# Altium PCB Nixie Valve Clock.PcbDoc (part 1 of 3)
Units mm, origin at the board's own origin, x right, y up, seen from the top; angles counter-clockwise.
Board outline 55 x 181 mm, 2 copper layers (Top Layer, Bottom Layer), stack 1.57 mm thick; 131 components, 140 nets, 506 pads, 541 vias.
Unrouted connection lines stored in the file: 104.
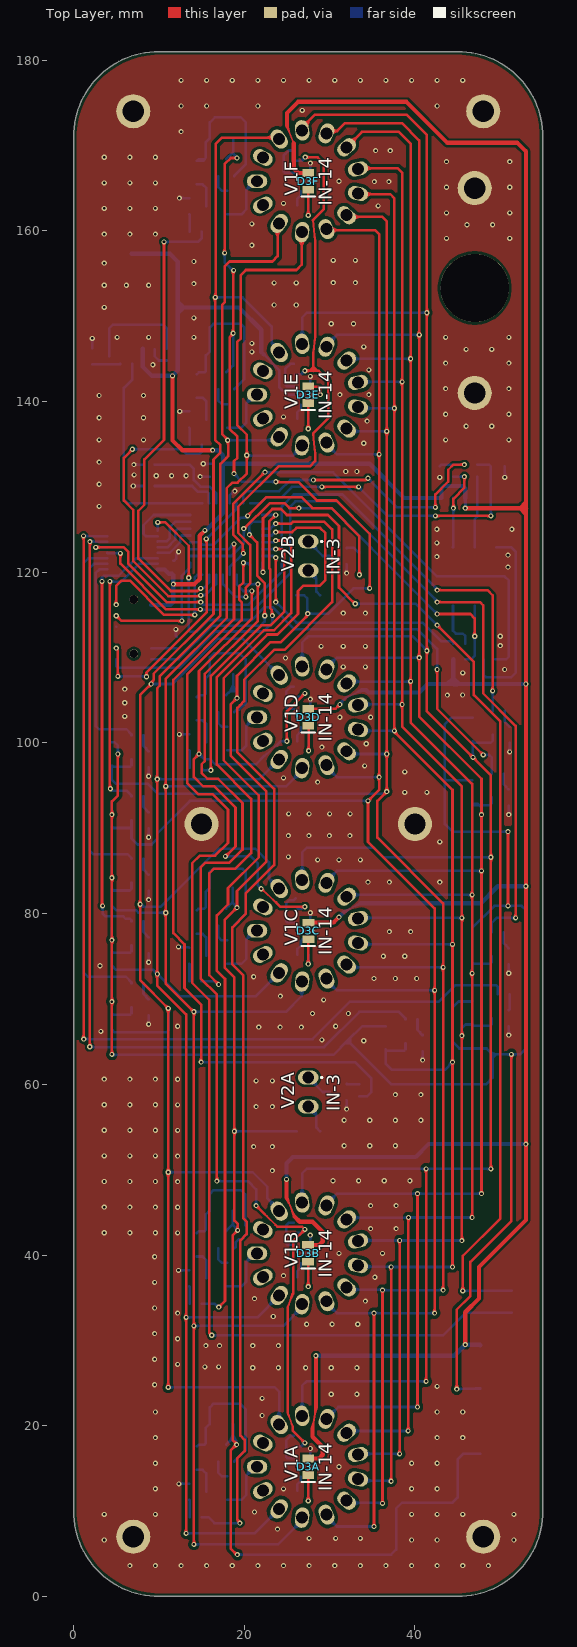
[diagram p0: Top Layer view]
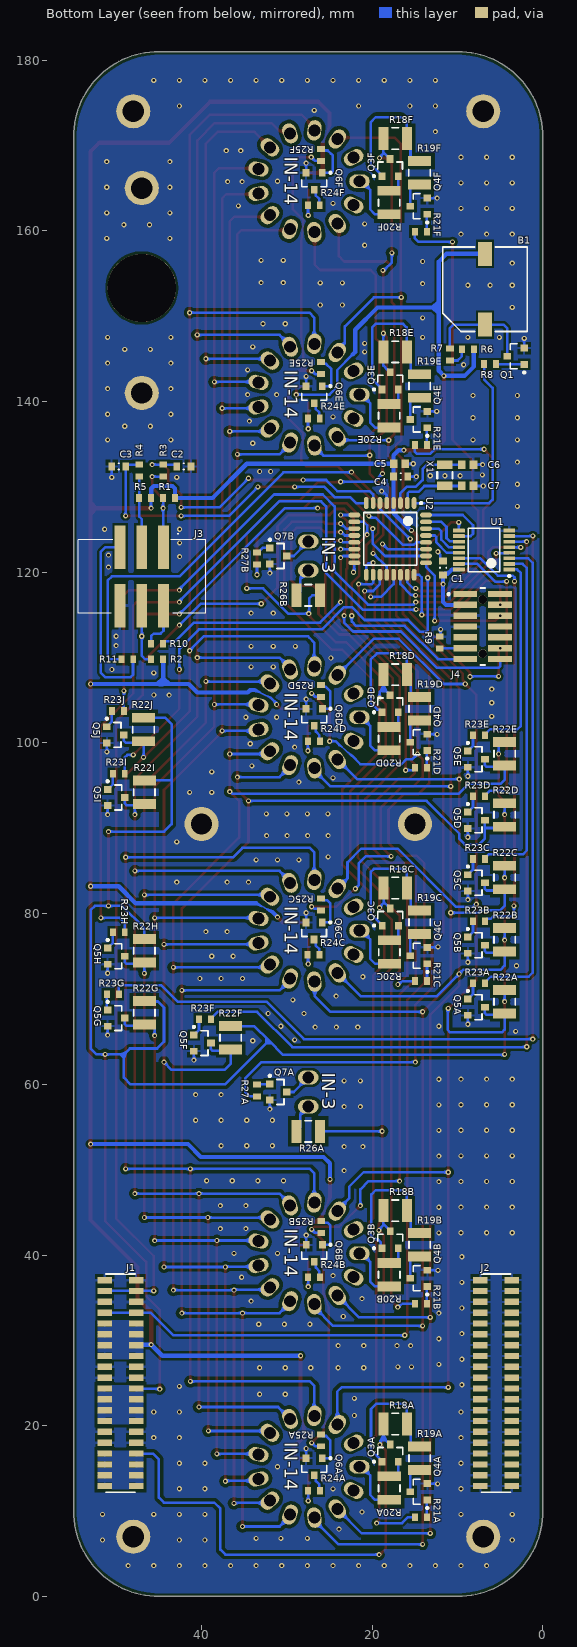
[diagram p1: Bottom Layer view, seen from below]
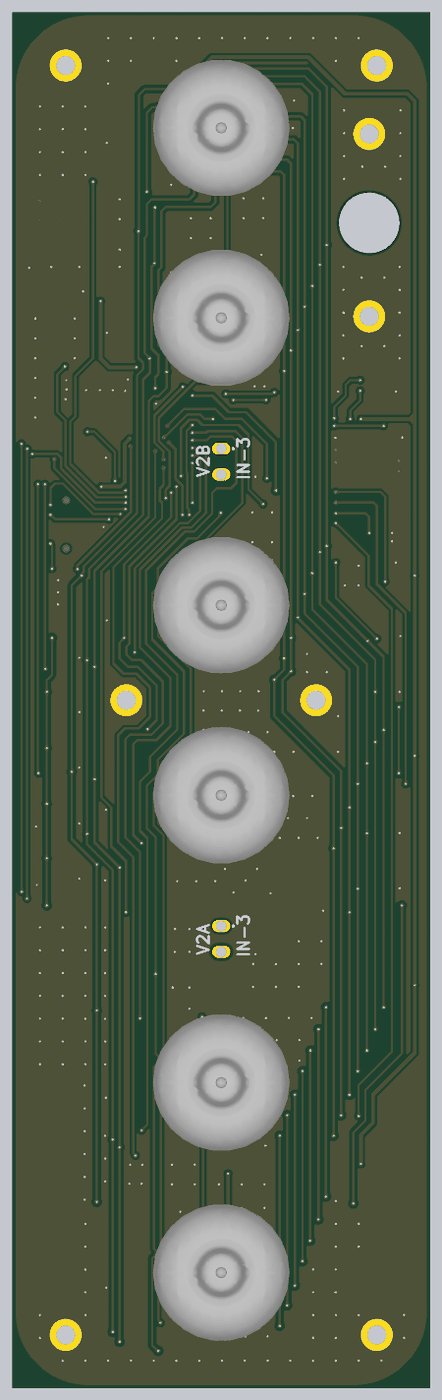
[diagram p3: 3D render of the assembled board from above, using the file's embedded part models]

## Layer stack, top to bottom
Top Solder: solder mask 0.01, SM-001, Dk 4
Top Layer: signal copper 0.035
Dielectric 1: core 1.5, FR4, Dk 4.3
Bottom Layer: signal copper 0.035
Bottom Solder: solder mask 0.01, SM-001, Dk 4

## Board outline
10,0 45,0 ccw(c45,10) 55,10 55,171 ccw(c45,171) 45,181 10,181 ccw(c10,171) 0,171 0,10 ccw(c10,10)

## Design rules (kind name [scope] priority, off if disabled: settings)
BoardOutlineClearance [All] p1: gap=0.4 ignorepadtopadclearanceinfootprint=FALSE
Clearance Clearance_HV [InNetClass('HIGH VOLTAGE')] p1: gap=0.4 ignorepadtopadclearanceinfootprint=FALSE
Clearance Clearance_HV_100V [InNetClass('HIGH VOLTAGE 100V')] p2: gap=0.4 ignorepadtopadclearanceinfootprint=FALSE
Clearance Clearance_NPTH_to_Track [IsThruPin AND NOT(PadIsPlated) vs IsTrack] p3: gap=0.2 ignorepadtopadclearanceinfootprint=FALSE
Clearance Clearance_GND_Planes [InPoly AND InNet('GND')] p4: gap=0.3 ignorepadtopadclearanceinfootprint=FALSE
Clearance Clearance_PTH_to_Track [IsTrack vs IsThruPin AND PadIsPlated] p5: gap=0.28 ignorepadtopadclearanceinfootprint=FALSE
Clearance Clearance_Via_to_Track [IsVia vs IsTrack] p6: gap=0.2 ignorepadtopadclearanceinfootprint=FALSE
Clearance Clearance_SMD_Pad_to_SMD_Pad [IsPad AND NOT(IsThruPin) vs IsPad AND NOT(IsThruPin)] p7: gap=0.15 ignorepadtopadclearanceinfootprint=FALSE
Clearance Clearance_Pad_to_Track [IsPad vs IsTrack] p8: gap=0.1 ignorepadtopadclearanceinfootprint=FALSE
Clearance Clearance_Inner_Cu_to_PTH [OnLayer('Inner 1') OR OnLayer('Inner 2') vs IsThruPin AND PadIsPlated] p9: gap=0.1 ignorepadtopadclearanceinfootprint=FALSE
Clearance Clearance_Inner_Cu_to_Vias [IsVia vs OnLayer('Inner 1') OR OnLayer('Inner 2')] p10: gap=1.95 ignorepadtopadclearanceinfootprint=FALSE
Clearance Clearance_Same_Nets [IsTrack vs IsTrack] p11: gap=0.25 ignorepadtopadclearanceinfootprint=FALSE
Clearance Minimum_Clearance [All] p12: gap=0.1 ignorepadtopadclearanceinfootprint=FALSE
HoleSize "Minimum Hole Size PTH" [(IsThruPin AND IsPad And PadIsPlated)] p1: absolutevalues=TRUE maxlimit=2.54 minlimit=0.3 maxpercent=80.000 minpercent=20.000
HoleSize "Minimum Hole Size VIA" [IsVia] p2: absolutevalues=TRUE maxlimit=2.54 minlimit=0.15 maxpercent=80.000 minpercent=20.000
HoleSize "Minimum Hole Size NPTH" [(IsThruPin AND IsPad And (NOT PadIsPlated))] p3: absolutevalues=TRUE maxlimit=2.54 minlimit=0.5 maxpercent=80.000 minpercent=20.000
HoleToHoleClearance ViaHoleToHoleClearance [IsVia vs IsVia] p1: gap=0.2 allowstackedmicrovias=TRUE
HoleToHoleClearance PadHoleToHoleClearance [IsPad vs IsPad] p2: gap=0.45 allowstackedmicrovias=TRUE
MinimumAnnularRing PTH_MinimumAnnularRing [(IsThruPin AND IsPad And PadIsPlated)] p1: minimumring=0.2
MinimumAnnularRing VIA_MinimumAnnularRing [IsVia] p2: minimumring=0.05
MinimumAnnularRing NPTH_MinimumAnnularRing [(IsThruPin AND IsPad And (NOT PadIsPlated))] p3: minimumring=0.45
MinimumSolderMaskSliver [All] p1: minsoldermaskwidth=0.1
PolygonConnect PolygonConnect_GND_Vias_and_Pads [(IsVia AND InNet('GND')) OR (IsPad AND IsThruPin AND NOT(InAnyComponent) AND InNet('GND')) vs IsPoly AND InNet('GND')] p1: connectstyle=Direct reliefconductorwidth=0.254 reliefentries=4 polygonreliefangle="90 Angle" airgapwidth=0.254
PolygonConnect PolygonConnect_GND_Polys [InNet('GND') AND IsPoly] p2: connectstyle=Relief reliefconductorwidth=0.3 reliefentries=4 polygonreliefangle="90 Angle" airgapwidth=0.3
PolygonConnect PolygonConnect_Non_GND_Polys [NOT(InNet('GND')) AND InPoly] p3: connectstyle=Direct reliefconductorwidth=0.254 reliefentries=4 polygonreliefangle="90 Angle" airgapwidth=0.254
RoutingVias [All] p1: holewidth=0.3 width=0.6 viastyle="Through Hole" minholewidth=0.3 minwidth=0.6 maxholewidth=5 maxwidth=3
SilkToSilkClearance [All] p1: silktosilkclearance=0.1
SilkToSolderMaskClearance [All] p1: minsilkscreentomaskgap=0 clearancetoexposedcopper=FALSE
SolderMaskExpansion SolderMaskExpansion_Tented_Vias [IsVia] p1: expansion=0 istentingtop=TRUE
SolderMaskExpansion [All] p2: expansion=0.1 istentingtop=FALSE
SupplyNets "Schematic Supply Nets_2" [InNet('+3V3')] p1: voltage=0.000
SupplyNets "Schematic Supply Nets_4" [InNet('GND')] p2: voltage=0.000
SupplyNets "Schematic Supply Nets_1" [InNet('+HV')] p3: voltage=0.000
SupplyNets "Schematic Supply Nets" [InNet('+100V')] p4: voltage=0.000
Width "Minimum Width" [All] p1: maxlimit=3 minlimit=0.2 preferedwidth=0.3
25 further rules are at their usual default settings.

## Classes and differential pairs
net class "HIGH VOLTAGE 100V": +100V C_0 C_1 C_2 C_3 C_4 C_5 C_6 C_7 C_8 C_9
net class C_[0..9]: C_0 C_1 C_2 C_3 C_4 C_5 C_6 C_7 C_8 C_9
net class POWER: +3V3 GND
net class "HIGH VOLTAGE": +HV ANODE_DRIVER_0 ANODE_DRIVER_1 ANODE_DRIVER_2 ANODE_DRIVER_3 ANODE_DRIVER_4 ANODE_DRIVER_5 NetQ3A_1 NetQ3A_2 NetQ3B_1 NetQ3B_2 NetQ3C_1 NetQ3C_2 NetQ3D_1 NetQ3D_2 NetQ3E_1 NetQ3E_2 NetQ3F_1 NetQ3F_2 NetR26A_1 NetR26B_1
component class "Nixie Valve Clock": C1 J1 J2 U1
net class T_L_SW_[0..2]: T_L_SW_0 T_L_SW_1 T_L_SW_2
net class IN-3_SW_[0..1]: IN-3_SW_0 IN-3_SW_1
net class BCD[0..3]: BCD0 BCD1 BCD2 BCD3
component class MCU: B1 C2 C3 C4 C5 C6 C7 J3 J4 Q1 R1 R2 R3 R4 R5 R6 R7 R8 R9 R10 R11 U2 X1
channel class "IN-3 VALVE CATHODE DRIVER": "IN-3 VALVE CATHODE DRIVER0" "IN-3 VALVE CATHODE DRIVER1"
net class IN-3_CATHODE_[0..1]: IN-3_CATHODE_0 IN-3_CATHODE_1
component class "IN-3 VALVE CATHODE DRIVER1": Q7B R27B
component class "IN-3 VALVE CATHODE DRIVER0": Q7A R27A
component class "IN-3 VALVE_1": R26B V2B
component class "IN-3 VALVE_0": R26A V2A
channel class "IN-3 VALVE": "IN-3 VALVE_0" "IN-3 VALVE_1"
channel class "IN-14 VALVE x2": IN-14_VALVE_x2_0 IN-14_VALVE_x2_1 IN-14_VALVE_x2_2
channel class "IN-14 VALVE CATHODE DRIVER": "IN-14 VALVE CATHODE DRIVER_0" "IN-14 VALVE CATHODE DRIVER_1" "IN-14 VALVE CATHODE DRIVER_2" "IN-14 VALVE CATHODE DRIVER_3" "IN-14 VALVE CATHODE DRIVER_4" "IN-14 VALVE CATHODE DRIVER_5" "IN-14 VALVE CATHODE DRIVER_6" "IN-14 VALVE CATHODE DRIVER_7" "IN-14 VALVE CATHODE DRIVER_8" "IN-14 VALVE CATHODE DRIVER_9"
channel class "IN-14 VALVE ANODE DRIVER": "IN-14 VALVE ANODE DRIVER0" "IN-14 VALVE ANODE DRIVER1" "IN-14 VALVE ANODE DRIVER2" "IN-14 VALVE ANODE DRIVER3" "IN-14 VALVE ANODE DRIVER4" "IN-14 VALVE ANODE DRIVER5"
channel class "IN-14 VALVE": "IN-14 VALVE_01" "IN-14 VALVE_02" "IN-14 VALVE_03" "IN-14 VALVE_11" "IN-14 VALVE_12" "IN-14 VALVE_13"
net class CS_[0..9]: CS_0 CS_1 CS_2 CS_3 CS_4 CS_5 CS_6 CS_7 CS_8 CS_9
net class AS_[0..5]: AS_0 AS_1 AS_2 AS_3 AS_4 AS_5
net class ANODE_DRIVER_[0..5]: ANODE_DRIVER_0 ANODE_DRIVER_1 ANODE_DRIVER_2 ANODE_DRIVER_3 ANODE_DRIVER_4 ANODE_DRIVER_5
component class "IN-14 VALVE CATHODE DRIVER_9": Q5J R22J R23J
component class "IN-14 VALVE CATHODE DRIVER_8": Q5I R22I R23I
component class "IN-14 VALVE CATHODE DRIVER_7": Q5H R22H R23H
component class "IN-14 VALVE CATHODE DRIVER_6": Q5G R22G R23G
component class "IN-14 VALVE CATHODE DRIVER_5": Q5F R22F R23F
component class "IN-14 VALVE CATHODE DRIVER_4": Q5E R22E R23E
component class "IN-14 VALVE CATHODE DRIVER_3": Q5D R22D R23D
component class "IN-14 VALVE CATHODE DRIVER_2": Q5C R22C R23C
component class "IN-14 VALVE CATHODE DRIVER_1": Q5B R22B R23B
component class "IN-14 VALVE CATHODE DRIVER_0": Q5A R22A R23A
component class "IN-14 VALVE ANODE DRIVER5": Q3F Q4F R18F R19F R20F R21F
component class "IN-14 VALVE ANODE DRIVER4": Q3E Q4E R18E R19E R20E R21E
component class "IN-14 VALVE ANODE DRIVER3": Q3D Q4D R18D R19D R20D R21D
component class "IN-14 VALVE ANODE DRIVER2": Q3C Q4C R18C R19C R20C R21C
component class "IN-14 VALVE ANODE DRIVER1": Q3B Q4B R18B R19B R20B R21B
component class "IN-14 VALVE ANODE DRIVER0": Q3A Q4A R18A R19A R20A R21A
component class "IN-14 VALVE_13": D3F Q6F R24F R25F V1F
component class "IN-14 VALVE_12": D3D Q6D R24D R25D V1D
component class "IN-14 VALVE_11": D3B Q6B R24B R25B V1B
component class "IN-14 VALVE_03": D3E Q6E R24E R25E V1E
component class "IN-14 VALVE_02": D3C Q6C R24C R25C V1C
component class "IN-14 VALVE_01": D3A Q6A R24A R25A V1A

## Components (designator, comment, footprint, x,y, rotation, side; value= is the part's Value field where it differs from the comment)
B1 "MI-SMT09-0327-SK" INDP9696X53N 6.8,153.15 r270 bottom
C1 "CGA3E2X7R1H104K080AA" CAPC1608X09N 11.7,120.5 r90 bottom value=100nF
C2 "CGA3E2X7R1H104K080AA" CAPC1608X09N 42.075,132.4 r180 bottom value=100nF
C3 "CGA3E2X7R1H104K080AA" CAPC1608X09N 49.7,132.4 r180 bottom value=100nF
C4 "CGA3E2X7R1H104K080AA" CAPC1608X09N 16.675,131.2 r180 bottom value=100nF
C5 "06036D476MAT2A" CAPC1608X87X35NL15T15 16.825,132.7 r180 bottom value=47µF
C6 "C0603X150J5GACTU" CAPC1608X87X35NL15T15 8.825,132.6 r180 bottom value=15pF
C7 "C0603X150J5GACTU" CAPC1608X87X35NL15T15 8.825,130.1 r180 bottom value=15pF
D3A "IN-S85AT5UW" DIOC2012X11N 27.5,15.2 r90 top locked (schematic designator D3)
D3B "IN-S85AT5UW" DIOC2012X11N 27.493,40.199 r90 top (schematic designator D3)
D3C "IN-S85AT5UW" DIOC2012X11N 27.51,77.971 r90 top (schematic designator D3)
D3D "IN-S85AT5UW" DIOC2012X11N 27.498,102.996 r90 top (schematic designator D3)
D3E "IN-S85AT5UW" DIOC2012X11N 27.502,140.799 r90 top (schematic designator D3)
D3F "IN-S85AT5UW" DIOC2012X11N 27.501,165.797 r90 top (schematic designator D3)
J1 "FLE-120-01-G-DV" FLE-120-01-XX-DV 49.5,25 r90 bottom locked
J2 "FLE-120-01-G-DV" FLE-120-01-XX-DV 5.5,25 r90 bottom locked
J3 "N2506-6V0C-RB-WD" N2506-6V0C-RB-WD-Footprint-1 47,119.5 r0 bottom locked
J4 "FTSH-107-01-L-DV-K-A" FP-FTSH-107-01-L-DV-K-A-MFG 7.065,113.63 r270 bottom
Q1 "MMBTA42LT1G" ONSC-SOT-23-3-318-08_V 3.2,145.3 r0 bottom
Q3A "MMBTA42LT1G" ONSC-SOT-23-3-318-08_V 17.9,16.8 r90 bottom (schematic designator Q3)
Q3B "MMBTA42LT1G" ONSC-SOT-23-3-318-08_V 17.9,41.803 r90 bottom (schematic designator Q3)
Q3C "MMBTA42LT1G" ONSC-SOT-23-3-318-08_V 17.888,79.597 r90 bottom (schematic designator Q3)
Q3D "MMBTA42LT1G" ONSC-SOT-23-3-318-08_V 17.904,104.601 r90 bottom (schematic designator Q3)
Q3E "MMBTA42LT1G" ONSC-SOT-23-3-318-08_V 17.901,142.409 r90 bottom (schematic designator Q3)
Q3F "MMBTA42LT1G" ONSC-SOT-23-3-318-08_V 17.906,167.402 r90 bottom (schematic designator Q3)
Q4A "MMBTA42LT1G" ONSC-SOT-23-3-318-08_V 14.553,12.273 r0 bottom (schematic designator Q4)
Q4B "MMBTA42LT1G" ONSC-SOT-23-3-318-08_V 14.553,37.276 r0 bottom (schematic designator Q4)
Q4C "MMBTA42LT1G" ONSC-SOT-23-3-318-08_V 14.541,75.07 r0 bottom (schematic designator Q4)
Q4D "MMBTA42LT1G" ONSC-SOT-23-3-318-08_V 14.558,100.074 r0 bottom (schematic designator Q4)
Q4E "MMBTA42LT1G" ONSC-SOT-23-3-318-08_V 14.554,137.882 r0 bottom (schematic designator Q4)
Q4F "MMBTA42LT1G" ONSC-SOT-23-3-318-08_V 14.559,162.875 r0 bottom (schematic designator Q4)
Q5A "MMBTA42LT1G" ONSC-SOT-23-3-318-08_V 7.797,69.039 r180 bottom (schematic designator Q5)
Q5B "MMBTA42LT1G" ONSC-SOT-23-3-318-08_V 7.797,76.3 r180 bottom (schematic designator Q5)
Q5C "MMBTA42LT1G" ONSC-SOT-23-3-318-08_V 7.797,83.608 r180 bottom (schematic designator Q5)
Q5D "MMBTA42LT1G" ONSC-SOT-23-3-318-08_V 7.797,90.938 r180 bottom (schematic designator Q5)
Q5E "MMBTA42LT1G" ONSC-SOT-23-3-318-08_V 7.797,98.095 r180 bottom (schematic designator Q5)
Q5F "MMBTA42LT1G" ONSC-SOT-23-3-318-08_V 39.897,64.831 r180 bottom (schematic designator Q5)
Q5G "MMBTA42LT1G" ONSC-SOT-23-3-318-08_V 49.997,67.762 r180 bottom (schematic designator Q5)
Q5H "MMBTA42LT1G" ONSC-SOT-23-3-318-08_V 49.997,75.016 r180 bottom (schematic designator Q5)
Q5I "MMBTA42LT1G" ONSC-SOT-23-3-318-08_V 49.997,93.605 r180 bottom (schematic designator Q5)
Q5J "MMBTA42LT1G" ONSC-SOT-23-3-318-08_V 50.097,100.941 r180 bottom (schematic designator Q5)
Q6A "MMBTA42LT1G" ONSC-SOT-23-3-318-08_V 26.8,15.2 r270 bottom (schematic designator Q6)
Q6B "MMBTA42LT1G" ONSC-SOT-23-3-318-08_V 26.793,40.199 r270 bottom (schematic designator Q6)
Q6C "MMBTA42LT1G" ONSC-SOT-23-3-318-08_V 26.81,77.971 r270 bottom (schematic designator Q6)
Q6D "MMBTA42LT1G" ONSC-SOT-23-3-318-08_V 26.798,102.996 r270 bottom (schematic designator Q6)
Q6E "MMBTA42LT1G" ONSC-SOT-23-3-318-08_V 26.802,140.799 r270 bottom (schematic designator Q6)
Q6F "MMBTA42LT1G" ONSC-SOT-23-3-318-08_V 26.801,165.797 r270 bottom (schematic designator Q6)
Q7A "MMBTA42LT1G" ONSC-SOT-23-3-318-08_V 31,59.1 r180 bottom (schematic designator Q7)
Q7B "MMBTA42LT1G" ONSC-SOT-23-3-318-08_V 31,121.9 r180 bottom (schematic designator Q7)
R1 "Resistor 4k7 +/-1% 0603 100 mW" RESC1608X55X25NL10T15 43.8,128.7 r180 bottom value=4.7k
R2 "Resistor 4k7 +/-1% 0603 100 mW" RESC1608X55X25NL10T15 45.2,109.8 r180 bottom value=4.7k
R3 "Resistor 4k7 +/-1% 0603 100 mW" RESC1608X55X25NL10T15 44.5,131.9 r270 bottom value=4.7k
R4 "Resistor 4k7 +/-1% 0603 100 mW" RESC1608X55X25NL10T15 47.3,131.9 r270 bottom value=4.7k
R5 "Resistor 4k7 +/-1% 0603 100 mW" RESC1608X55X25NL10T15 46.6,128.7 r0 bottom value=4.7k
R6 "Resistor 4k7 +/-1% 0603 100 mW" RESC1608X55X25NL10T15 8.8,146.1 r180 bottom value=4.7k
R7 "Resistor 4k7 +/-1% 0603 100 mW" RESC1608X55X25NL10T15 10.9,145.5 r270 bottom value=4.7k
R8 "Resistor 4k7 +/-1% 0603 100 mW" RESC1608X55X25NL10T15 6.2,144.4 r180 bottom value=4.7k
R9 "ERJ-3EKF1000V" RESC1608X55X25NL10T15 12.075,111.767 r270 bottom value=100R
R10 "CRCW0603150RFKEAHP" RESC1608X55X25NL10T15 45.2,111.6 r180 bottom value=150R
R11 "CRCW0603150RFKEAHP" RESC1608X55X25NL10T15 48.7,109.8 r0 bottom value=150R
R18A "CRGCQ1210F100K" RESC3126X65X50NL10T20 17.312,20.203 r0 bottom value=100kR (schematic designator R18)
R18B "CRGCQ1210F100K" RESC3126X65X50NL10T20 17.312,45.207 r0 bottom value=100kR (schematic designator R18)
R18C "CRGCQ1210F100K" RESC3126X65X50NL10T20 17.3,83 r0 bottom value=100kR (schematic designator R18)
R18D "CRGCQ1210F100K" RESC3126X65X50NL10T20 17.317,108.004 r0 bottom value=100kR (schematic designator R18)
R18E "CRGCQ1210F100K" RESC3126X65X50NL10T20 17.314,145.812 r0 bottom value=100kR (schematic designator R18)
R18F "CRGCQ1210F100K" RESC3126X65X50NL10T20 17.318,170.805 r0 bottom value=100kR (schematic designator R18)
R19A "ERJP14F1303U" RESC3126X65X50NL10T20 14.453,16.206 r90 bottom value=130kR (schematic designator R19)
R19B "ERJP14F1303U" RESC3126X65X50NL10T20 14.453,41.209 r90 bottom value=130kR (schematic designator R19)
R19C "ERJP14F1303U" RESC3126X65X50NL10T20 14.441,79.003 r90 bottom value=130kR (schematic designator R19)
R19D "ERJP14F1303U" RESC3126X65X50NL10T20 14.458,104.007 r90 bottom value=130kR (schematic designator R19)
R19E "ERJP14F1303U" RESC3126X65X50NL10T20 14.454,141.815 r90 bottom value=130kR (schematic designator R19)
R19F "ERJP14F1303U" RESC3126X65X50NL10T20 14.459,166.808 r90 bottom value=130kR (schematic designator R19)
R20A "CRGCQ1210F4K7" RESC3126X65X50NL10T20 18.012,12.703 r90 bottom value=4.7kR (schematic designator R20)
R20B "CRGCQ1210F4K7" RESC3126X65X50NL10T20 18.012,37.707 r90 bottom value=4.7kR (schematic designator R20)
R20C "CRGCQ1210F4K7" RESC3126X65X50NL10T20 18,75.5 r90 bottom value=4.7kR (schematic designator R20)
R20D "CRGCQ1210F4K7" RESC3126X65X50NL10T20 18.017,100.504 r90 bottom value=4.7kR (schematic designator R20)
R20E "CRGCQ1210F4K7" RESC3126X65X50NL10T20 18.014,138.312 r90 bottom value=4.7kR (schematic designator R20)
R20F "CRGCQ1210F4K7" RESC3126X65X50NL10T20 18.018,163.305 r90 bottom value=4.7kR (schematic designator R20)
R21A "Resistor 4k7 +/-1% 0603 100 mW" RESC1608X55X25NL10T15 14.3,9.3 r180 bottom value=4.7k (schematic designator R21)
R21B "Resistor 4k7 +/-1% 0603 100 mW" RESC1608X55X25NL10T15 14.3,34.303 r180 bottom value=4.7k (schematic designator R21)
R21C "Resistor 4k7 +/-1% 0603 100 mW" RESC1608X55X25NL10T15 14.288,72.097 r180 bottom value=4.7k (schematic designator R21)
R21D "Resistor 4k7 +/-1% 0603 100 mW" RESC1608X55X25NL10T15 14.304,97.101 r180 bottom value=4.7k (schematic designator R21)
R21E "Resistor 4k7 +/-1% 0603 100 mW" RESC1608X55X25NL10T15 14.301,134.909 r180 bottom value=4.7k (schematic designator R21)
R21F "Resistor 4k7 +/-1% 0603 100 mW" RESC1608X55X25NL10T15 14.306,159.902 r180 bottom value=4.7k (schematic designator R21)
R22A "ERJP14F1303U" RESC3126X65X50NL10T20 4.497,69.664 r90 bottom value=130kR (schematic designator R22)
R22B "ERJP14F1303U" RESC3126X65X50NL10T20 4.497,76.925 r90 bottom value=130kR (schematic designator R22)
R22C "ERJP14F1303U" RESC3126X65X50NL10T20 4.497,84.233 r90 bottom value=130kR (schematic designator R22)
R22D "ERJP14F1303U" RESC3126X65X50NL10T20 4.497,91.563 r90 bottom value=130kR (schematic designator R22)
R22E "ERJP14F1303U" RESC3126X65X50NL10T20 4.497,98.72 r90 bottom value=130kR (schematic designator R22)
R22F "ERJP14F1303U" RESC3126X65X50NL10T20 36.597,65.456 r90 bottom value=130kR (schematic designator R22)
R22G "ERJP14F1303U" RESC3126X65X50NL10T20 46.697,68.387 r90 bottom value=130kR (schematic designator R22)
R22H "ERJP14F1303U" RESC3126X65X50NL10T20 46.697,75.641 r90 bottom value=130kR (schematic designator R22)
R22I "ERJP14F1303U" RESC3126X65X50NL10T20 46.697,94.23 r90 bottom value=130kR (schematic designator R22)
R22J "ERJP14F1303U" RESC3126X65X50NL10T20 46.797,101.566 r90 bottom value=130kR (schematic designator R22)
R23A "Resistor 4k7 +/-1% 0603 100 mW" RESC1608X55X25NL10T15 7.497,71.839 r0 bottom value=4.7k (schematic designator R23)
R23B "Resistor 4k7 +/-1% 0603 100 mW" RESC1608X55X25NL10T15 7.497,79.1 r0 bottom value=4.7k (schematic designator R23)
R23C "Resistor 4k7 +/-1% 0603 100 mW" RESC1608X55X25NL10T15 7.497,86.408 r0 bottom value=4.7k (schematic designator R23)
R23D "Resistor 4k7 +/-1% 0603 100 mW" RESC1608X55X25NL10T15 7.497,93.738 r0 bottom value=4.7k (schematic designator R23)
R23E "Resistor 4k7 +/-1% 0603 100 mW" RESC1608X55X25NL10T15 7.497,100.895 r0 bottom value=4.7k (schematic designator R23)
R23F "Resistor 4k7 +/-1% 0603 100 mW" RESC1608X55X25NL10T15 39.597,67.631 r0 bottom value=4.7k (schematic designator R23)
R23G "Resistor 4k7 +/-1% 0603 100 mW" RESC1608X55X25NL10T15 50.397,70.562 r0 bottom value=4.7k (schematic designator R23)
R23H "Resistor 4k7 +/-1% 0603 100 mW" RESC1608X55X25NL10T15 49.697,77.816 r0 bottom value=4.7k (schematic designator R23)
R23I "Resistor 4k7 +/-1% 0603 100 mW" RESC1608X55X25NL10T15 49.697,96.405 r0 bottom value=4.7k (schematic designator R23)
R23J "Resistor 4k7 +/-1% 0603 100 mW" RESC1608X55X25NL10T15 49.797,103.741 r0 bottom value=4.7k (schematic designator R23)
R24A "ERJ-3EKF33R0V" RESC1608X55X25NL10T15 26.85,12.4 r0 bottom value=33R (schematic designator R24)
R24B "ERJ-3EKF33R0V" RESC1608X55X25NL10T15 26.843,37.399 r0 bottom value=33R (schematic designator R24)
R24C "ERJ-3EKF33R0V" RESC1608X55X25NL10T15 26.86,75.171 r0 bottom value=33R (schematic designator R24)
R24D "ERJ-3EKF33R0V" RESC1608X55X25NL10T15 26.848,100.196 r0 bottom value=33R (schematic designator R24)
R24E "ERJ-3EKF33R0V" RESC1608X55X25NL10T15 26.852,137.999 r0 bottom value=33R (schematic designator R24)
R24F "ERJ-3EKF33R0V" RESC1608X55X25NL10T15 26.851,162.997 r0 bottom value=33R (schematic designator R24)
R25A "Resistor 4k7 +/-1% 0603 100 mW" RESC1608X55X25NL10T15 26,18.3 r90 bottom value=4.7k (schematic designator R25)
R25B "Resistor 4k7 +/-1% 0603 100 mW" RESC1608X55X25NL10T15 25.993,43.299 r90 bottom value=4.7k (schematic designator R25)
R25C "Resistor 4k7 +/-1% 0603 100 mW" RESC1608X55X25NL10T15 26.01,81.071 r90 bottom value=4.7k (schematic designator R25)
R25D "Resistor 4k7 +/-1% 0603 100 mW" RESC1608X55X25NL10T15 25.998,106.096 r90 bottom value=4.7k (schematic designator R25)
R25E "Resistor 4k7 +/-1% 0603 100 mW" RESC1608X55X25NL10T15 26.002,143.899 r90 bottom value=4.7k (schematic designator R25)
R25F "Resistor 4k7 +/-1% 0603 100 mW" RESC1608X55X25NL10T15 26.001,168.897 r90 bottom value=4.7k (schematic designator R25)
R26A "SG73P2ETTD3003F" RESC3126X65X50NL10T20 27.5,54.5 r180 bottom value=300kR (schematic designator R26)
R26B "SG73P2ETTD3003F" RESC3126X65X50NL10T20 27.5,117.3 r180 bottom value=300kR (schematic designator R26)
R27A "Resistor 4k7 +/-1% 0603 100 mW" RESC1608X55X25NL10T15 33.5,59.3 r90 bottom value=4.7k (schematic designator R27)
R27B "Resistor 4k7 +/-1% 0603 100 mW" RESC1608X55X25NL10T15 33.5,121.6 r90 bottom value=4.7k (schematic designator R27)
U1 "CD4028BPWR" PW0016A_N 6.9,122.6 r0 bottom
U2 "STM32G031K8T6" TQFP80P900X900X160-32N 17.9,123.9 r270 bottom
V1A "IN-14" "Nixie IN-14 Valve" 27.5,15.2 r90 top locked (schematic designator V1)
V1B "IN-14" "Nixie IN-14 Valve" 27.5,40.2 r90 top locked (schematic designator V1)
V1C "IN-14" "Nixie IN-14 Valve" 27.5,78 r90 top locked (schematic designator V1)
V1D "IN-14" "Nixie IN-14 Valve" 27.5,103 r90 top locked (schematic designator V1)
V1E "IN-14" "Nixie IN-14 Valve" 27.5,140.8 r90 top locked (schematic designator V1)
V1F "IN-14" "Nixie IN-14 Valve" 27.5,165.8 r90 top locked (schematic designator V1)
V2A "IN-3" IN-3-Footprint-1 27.5,59.1 r90 top locked (schematic designator V2)
V2B "IN-3" IN-3-Footprint-1 27.5,121.9 r90 top locked (schematic designator V2)
X1 "NX3215SA-32.768K-STD-MUS-2" NX3215SA-32.768K-STD-MUS-2-Footprint-1 11.5,131.35 r270 bottom

## Footprints (in the part's own frame and the unit in brackets; to place one, negate y for a bottom-side part, rotate by r counter-clockwise, add the part's x,y. Pads: shape width x height; smd on the part's side, far side on the other; paste and mask are expansions set on the pad)
CAPC1608X09N [mm] "Chip Capacitor, 2-Leads, Body 1.60x0.80mm, IPC Medium Density"
  rect 0.8x0.95 smd: 1(-0.825,0) 2(0.825,0)
  silkscreen extent -0.05,-0.38 0.05,0.38, body extent -0.85,-0.45 0.85,0.45, height 0.9
CAPC1608X87X35NL15T15 [mm] "Chip Capacitor, 2-Leads, Body 1.75x0.95mm, IPC Medium Density"
  rect 0.9x1 smd: 1(-0.675,0) 2(0.675,0)
  body extent -0.87,-0.48 0.87,0.48, height 0.87
DIOC2012X11N [mm] "Chip Diode, 2-Leads, Body 2.00x1.25mm, IPC Medium Density"
  rect 0.9x1.4 smd: 1(-0.975,0) 2(0.975,0)
  silkscreen extent -1.78,-0.76 0.15,0.76, body extent -1,-0.63 1,0.63, height 1.1
FLE-120-01-XX-DV [mil]
  rect 29x66 smd: 1(-475,72.5) 2(-475,-72.5) 3(-425,72.5) 4(-425,-72.5) 5(-375,72.5) 6(-375,-72.5) 7(-325,72.5) 8(-325,-72.5) 9(-275,72.5) 10(-275,-72.5) 11(-225,72.5) 12(-225,-72.5) 13(-175,72.5) 14(-175,-72.5) 15(-125,72.5) 16(-125,-72.5) 17(-75,72.5) 18(-75,-72.5) 19(-25,72.5) 20(-25,-72.5) 21(25,72.5) 22(25,-72.5) 23(75,72.5) 24(75,-72.5) 25(125,72.5) 26(125,-72.5) 27(175,72.5) 28(175,-72.5) 29(225,72.5) 30(225,-72.5) 31(275,72.5) 32(275,-72.5) 33(325,72.5) 34(325,-72.5) 35(375,72.5) 36(375,-72.5) 37(425,72.5) 38(425,-72.5) 39(475,72.5) 40(475,-72.5)
  silkscreen extent -503,-68 503,68, body extent -502,-90 502,90, height 179
FP-FTSH-107-01-L-DV-K-A-MFG [mm]
  rect 0.74x2.79 smd: 1(-3.81,-2.035) 2(-3.81,2.035) 3(-2.54,-2.035) 4(-2.54,2.035) 5(-1.27,-2.035) 6(-1.27,2.035) 7(0,-2.035) 8(0,2.035) 9(1.27,-2.035) 10(1.27,2.035) 11(2.54,-2.035) 12(2.54,2.035) 13(3.81,-2.035) 14(3.81,2.035)
  round 1.02 hole 1.02 unplated paste-2539.97 mask+0: NPTH1(-3.175,0) NPTH2(3.175,0)
  silkscreen extent -4.51,-4.12 4.51,0.27, body extent -4.45,-2.92 4.45,2.92, height 6.38
IN-3-Footprint-1 [mm]
  oval 1.6x2.4 hole 1.4: 1(-1.7,0) 2(1.7,0)
  silkscreen extent 1.6,-1.66 1.8,-1.46
INDP9696X53N [mm] "Precision Wire Wound Inductor, 2-Leads, Body 9.60x9.60mm, IPC Medium Density"
  rect 2.8x1.6 smd: +(-4.15,0) -(4.15,0)
  silkscreen extent -4.95,-4.95 4.95,4.95, body extent -4.9,-4.8 4.9,4.8, height 5.4
N2506-6V0C-RB-WD-Footprint-1 [mm]
  rect 1.27x5.08 smd: 1(-2.54,-3.43) 2(-2.54,3.43) 3(0,-3.43) 4(0,3.43) 5(2.54,-3.43) 6(2.54,3.43)
  silkscreen extent -7.47,-5.05 7.47,4.3, body extent -7.47,-5.84 7.47,5.84, height 10.36
"Nixie IN-14 Valve" [mm]
  oval 1.6x2.4 hole 1.4 rot 124.61: 0(4.938,3.408)
  oval 1.6x2.4 hole 1.4 rot 55.38: 1(-4.938,3.408)
  oval 1.6x2.4 hole 1.4 rot 83.08: 2(-5.956,0.723)
  oval 1.6x2.4 hole 1.4 rot 110.77: 3(-5.61,-2.128)
  oval 1.6x2.4 hole 1.4 rot 138.46: 4(-3.979,-4.491)
  oval 1.6x2.4 hole 1.4 rot 166.15: 5(-1.436,-5.826)
  oval 1.6x2.4 hole 1.4 rot 13.84: 6(1.436,-5.826)
  oval 1.6x2.4 hole 1.4 rot 41.54: 7(3.979,-4.491)
  oval 1.6x2.4 hole 1.4 rot 69.23: 8(5.61,-2.128)
  oval 1.6x2.4 hole 1.4 rot 96.92: 9(5.956,0.723)
  oval 1.6x2.4 hole 1.4: ANODE(0,6)
  oval 1.6x2.4 hole 1.4 rot 27.69: LDP(-2.788,5.313)
  oval 1.6x2.4 hole 1.4 rot 152.3: RDP(2.789,5.313)
  body extent -8.97,-9 8.97,9, height 54.74
NX3215SA-32.768K-STD-MUS-2-Footprint-1 [mm]
  rect 1x1.8 smd: 1(-1.25,0) 2(1.25,0)
  silkscreen extent -0.38,-0.89 0.38,0.89
ONSC-SOT-23-3-318-08_V [mm] "SOT23, 3-Leads, Body 2.92x1.3mm, Pitch 0.95mm"
  rect 0.9x0.8 smd: 1(-1,0.95) 2(-1,-0.95) 3(1,0)
  silkscreen extent -1.12,-1.46 0.65,2.02, body extent -0.65,-1.46 0.65,1.46, height 1.11
PW0016A_N [mm] "SOP, 16-Leads, Body 5.1x4.5mm, Pitch 0.65mm, IPC Medium Density"
  rrect22% 1.4x0.45 smd: 1(-2.95,2.275) 2(-2.95,1.625) 3(-2.95,0.975) 4(-2.95,0.325) 5(-2.95,-0.325) 6(-2.95,-0.975) 7(-2.95,-1.625) 8(-2.95,-2.275) 9(2.95,-2.275) 10(2.95,-1.625) 11(2.95,-0.975) 12(2.95,-0.325) 13(2.95,0.325) 14(2.95,0.975) 15(2.95,1.625) 16(2.95,2.275)
  silkscreen extent -3.07,-2.55 1.85,3.17, body extent -3.21,-2.5 3.21,2.5, height 1
RESC1608X55X25NL10T15 [mm] "Chip Resistor, 2-Leads, Body 1.70x0.90mm, IPC Medium Density"
  rect 0.7x0.9 smd: 1(-0.7,0) 2(0.7,0)
  body extent -0.85,-0.45 0.85,0.45, height 0.55
RESC3126X65X50NL10T20 [mm] "Chip Resistor, 2-Leads, Body 3.10x2.60mm, IPC Medium Density"
  rect 1.15x2.7 smd: 1(-1.375,0) 2(1.375,0)
  silkscreen extent -0.4,-1.25 0.4,1.25, body extent -1.6,-1.35 1.6,1.35, height 0.65
TQFP80P900X900X160-32N [mm] "TQFP, 32-Leads, Body 7.00x7.00mm, Pitch 0.80mm, IPC Medium Density"
  oval 1.4x0.55 smd: 1(-4.2,2.8) 2(-4.2,2) 3(-4.2,1.2) 4(-4.2,0.4) 5(-4.2,-0.4) 6(-4.2,-1.2) 7(-4.2,-2) 8(-4.2,-2.8) 17(4.2,-2.8) 18(4.2,-2) 19(4.2,-1.2) 20(4.2,-0.4) 21(4.2,0.4) 22(4.2,1.2) 23(4.2,2) 24(4.2,2.8)
  oval 0.55x1.4 smd: 9(-2.8,-4.2) 10(-2,-4.2) 11(-1.2,-4.2) 12(-0.4,-4.2) 13(0.4,-4.2) 14(1.2,-4.2) 15(2,-4.2) 16(2.8,-4.2) 25(2.8,4.2) 26(2,4.2) 27(1.2,4.2) 28(0.4,4.2) 29(-0.4,4.2) 30(-1.2,4.2) 31(-2,4.2) 32(-2.8,4.2)
  silkscreen extent -4.32,-3.1 3.1,3.75, body extent -4.5,-4.5 4.5,4.5, height 1.6

## Part data
B1: library part CMP-00030-00004-2, "Magnetic Indicator SMT 9.6MM 3V", Mounting Technology=SMT, Pins=2, RoHS Compliant=Yes
C1 C2 C3 C4: library part CMP-001-00101-1, "Ceramic Capacitor, Multilayer, Ceramic, 50V, 10% +Tol, 10% -Tol, X7R, 15% TC, 0.1uF, Surface Mount, 0603", Capacitor Type=Ceramic, Case/Package=0603, Dielectric=X7R, Max Operating Temperature=125°C, Min Operating Temperature=-55°C, Package Shape=Rectangular, Package Style=SMTMeter, Rated DC Voltage (URdc)=50V, Tolerance=10%, Dielectric Material=Ceramic, Height=0.8mm, JESD-609 Code=e3, Length=1.6mm, Mounting Technology="Surface Mount", Multilayer=Yes, Packaging="Tape and Reel", Pins=2, Reach SVHC Compliant=Yes, Reference Standard=AEC-Q200, RoHS Compliant=Yes, Temperature Characteristics Code=X7R, Terminal Finish=Nickel, Termination=Wraparound, Tolerance  (fill in as +-)=10%, Tolerance (fill in as +-)=10%, Voltage Rating=50V, Width=0.8mm
C5: library part CMP-00388-1, "0603 (1608Metric) CERAMIC CAPACITOR ceramic capacitor 6.3V 47uF ±20% X5R", Capacitor Type=MLCC, Case/Package=0603, Dielectric=X5R, Dielectric Material=Ceramic, Max Operating Temperature=85°C, Min Operating Temperature=-55°C, Tolerance=20%, Voltage Rating=6.3V, Height=1.02mm, Length=1.6mm, Lifecycle Status=Production, Material=Ceramic, Mounting Technology="Surface Mount", Number of Terminals=2, Pins=2, REACH SVHC=Yes, RoHS=Compliant, RoHS Compliant=Yes, Schedule B=8532240020, Voltage Rating (DC)=6.3V, Width=800µm
C6 C7: library part CMP-00385-1, "Cap Ceramic 15pF 50V C0G 5% Pad SMD 0603 Flexible Termination 125C Extreme Low ESR T/R", Case Code (Imperial)=0603, Case Code (Metric)=1608, Dielectric=C0G, Dielectric Material=Ceramic, Max Operating Temperature=125°C, Min Operating Temperature=-55°C, Tolerance=5%, Voltage Rating=50V, Case/Package=0603, China RoHS=Compliant, Depth=800µm, Features="Soft Termination", Height=800µm, Lead Free="Lead Free", Length=1.6mm, Lifecycle Status=Production, Mounting Technology="Surface Mount", Number of Terminals=2, Packaging="Tape & Reel", Pins=2, Radiation Hardening=No, REACH SVHC=Yes, RoHS=Compliant, RoHS Compliant=Yes, Schedule B="8532240020, 8532240020", Termination=SMD/SMT, Thickness=863.6µm, Voltage Rating (DC)=50V, Width=800µm
D3A D3B D3C D3D D3E D3F: library part CMP-007-00039-1, "SMD LED - Mono Color Top View, 805 1.1mm LED PCB Type, White, High Brightness, Clear Lens, Angle 120", Case/Package=0805, Color=White, Forward Current=25mA, Forward Voltage=2.8V, Max Operating Temperature=85°C, Min Operating Temperature=-30°C, Reverse Voltage=5V, Colour=White, Height=1.1mm, Lens Style=Clear, Luminous Intensity=285mcd, Mounting Technology="Surface Mount", Nominal Vf=3.4V, Number of Circuits=1, Number of Terminals=2, Pins=2, RoHS=Non-Compliant, RoHS Compliant=Yes, Schedule B=8541402000, Shape=Rectangular, Terminal Pitch=1.6mm, Viewing Angle=120°
J1 J2: library part CMP-073-000000-3, "PCB Receptacle, Board-to-Board, Wire-to-Board, 1.27 mm, 2 Rows, 40 Contacts, Surface Mount", Color=Black, Contact Resistance=15mΩ, Current Rating=1.75A, Manufacturer Lifecycle Status=PRODUCTION, Max Operating Temperature=125°C, Min Operating Temperature=-55°C, Package=None, Availability=Unavailable, Component Type=Standard, Connector Type="Receptacle, Socket", Contact Material=Bronze, Contact Plating=Gold, Depth=3.33mm, Design Item ID=FLE-120-01-XX-DV, Gender=Receptacle, Housing Color=Black, Housing Material=Polymer, Lead Free="Lead Free", Lead Pitch=1.27mm, Length=25.51mm, Lifecycle Status=Production, Max Current Rating=1.75A, MF=Samtec, Mounting Technology="Surface Mount", MP=FLE-120-01-XX-DV, Number of Contacts=40, Number of Positions=40, Number of Rows=2, Orientation=Straight, Packaging=Bulk, Pin Count=40, Pins=40, Pitch=1.27mm, Price=None, Radiation Hardening=No, REACH SVHC=No, RoHS=Compliant, Row Spacing=1.27mm, Source=FLE-120-01-XX-DV.SchLib, Termination=Solder
J3: library part CMP-002-00208-1, "80001386988 N2506-6V0C-Rb-Wd=06//Ht/Vsmt/30U/Rohs/Cap/T&r", Color=Black, Current Rating=5A, Insulation Resistance=1GΩ, Max Operating Temperature=105°C, Min Operating Temperature=-55°C, Connector Type="Male Pin", Contact Gender=Male, Contact Material="Gold, Tin", Contact Mating Length=6.1722mm, Contact Plating=Gold, Height=11.06mm, Lifecycle Status=Production, Mounting Technology="Surface Mount", Number of Contacts=6, Number of Positions=6, Number of Rows=2, Pins=6, Pitch=2.54mm, Plating Thickness=762nm, REACH SVHC=Yes, RoHS=Compliant, Row Spacing=6.86mm, Terminal Pitch=2.54mm, Termination=Solder
J4: library part CMP-002-00203-1, "Conn Unshrouded Header HDR 14 POS 1.27mm Solder ST Top Entry SMD TIGER CLAW™ Tube", Current Rating=3.4A, Manufacturer Lifecycle Status=PRODUCTION, Max Operating Temperature=125°C, Min Operating Temperature=-55°C, Contact Material="Gold, Nickel", Contact Plating=Gold, Gender=Male, Height=6.38mm, Lead Free="Lead Free", Lifecycle Status=Production, Number of Contacts=14, Number of Rows=2, Orientation=Vertical, Pins=14, Pitch=1.27mm, RoHS=Compliant, Schedule B=8536694040, Termination=Solder
Q1 Q3A Q3B Q3C Q3D Q3E Q3F Q4A Q4B Q4C Q4D Q4E Q4F Q5A Q5B Q5C Q5D Q5E Q5F Q5G Q5H Q5I Q5J Q6A Q6B Q6C Q6D Q6E Q6F Q7A Q7B: library part CMP-013-00062-1, "Bipolar (BJT) Single Transistor, General Purpose, NPN, 300 V, 500 mA, 225 mW, SOT-23, Surface Mount", Case/Package=SOT-23-3, Clock Frequency=50MHz, Collector Base Voltage (VCBO)=300V, Collector Emitter Saturation Voltage=500mV, Current Rating=500mA, Emitter Base Voltage (VEBO)=6V, Manufacturer Lifecycle Status=ACTIVE, Max Operating Temperature=150°C, Max Power Dissipation=300mW, Min Operating Temperature=-55°C, China RoHS=Compliant, Collector Emitter Breakdown Voltage=300V, Collector Emitter Voltage (VCEO)=300V, Contact Plating=Tin, Element Configuration=Single, Frequency=50MHz, Gain Bandwidth Product=50MHz, Height=1.016mm, hFE Min=40, Lead Free="Lead Free", Length=3.0226mm, Lifecycle Status=Production, Max Breakdown Voltage=300V, Max Collector Current=500mA, Number of Elements=1, Number of Terminals=3, Packaging="Tape and Reel", Pins=3, Polarity=NPN, Radiation Hardening=No, REACH SVHC=Yes, RoHS=Compliant, Schedule B="8541210080, 8541210080", Transition Frequency=50MHz, Voltage Rating (DC)=300V, Weight=4.535924g, Width=1.397mm
R1 R2 R3 R4 R5 R6 R7 R8 R21A R21B R21C R21D R21E R21F R23A R23B R23C R23D R23E R23F R23G R23H R23I R23J R25A R25B R25C R25D R25E R25F R27A R27B: library part CMP-009-00031-13, "Chip Resistor, 4.7 KOhm, +/- 1%, 0.1 W, -55 to 155 degC, 0603 (1608 Metric)", Case/Package=0603, Max Operating Temperature=155°C, Min Operating Temperature=-55°C, Power=100mW, Tolerance=1%, Mounting Technology=SM, Pins=2, RoHS Compliant=True
R9: library part CMP-00265-1, "Fixed Resistor, Metal Glaze/thick Film, 0.1W, 100ohm, 75V, 1% +/-Tol, 100ppm/Cel, Surface Mount, 0603", Case/Package=0603, Max Operating Temperature=155°C, Min Operating Temperature=-55°C, Package Height=0.45mm, Package Length=1.6mm, Package Shape=Rectangular, Package Width=0.8mm, Power=100mW, Rated Temperature=70°C, Resistor Type="FIXED RESISTOR", Temperature Coefficient (ppm/Cel)=100, Tolerance=1%, Voltage Rating=75V, Construction=Rectangular, JESD-609 Code=e3, Mounting Technology="Surface Mount", Packaging="Tape and Reel", Pins=2, Reach SVHC Compliant=Yes, Reference Standard=AEC-Q200, RoHS Compliant=Yes, Technology="METAL GLAZE/THICK FILM", Terminal Finish=Nickel, Termination=Wraparound, Working Voltage=75V
R10 R11: library part CMP-00382-2, "Res Thick Film 0603 150 Ohm 1% 1/3W ±100ppm/°C Molded SMD SMD Paper T/R", Case Code (Imperial)=0603, Case Code (Metric)=1608, Max Operating Temperature=155°C, Max Power Dissipation=250mW, Min Operating Temperature=-55°C, Power=100mW, Power Dissipation=330mW, Temperature Coefficient=100ppm/°C, Tolerance=1%, Voltage Rating=75V, Case/Package=0603, China RoHS=Non-Compliant, Composition="Thick Film", Contact Plating=Tin, Depth=850µm, Features="Automotive AEC-Q200", Height=450µm, Lead Free="Lead Free", Length=1.55mm, Lifecycle Status=Production, Military Standard=Not, Mounting Technology="Surface Mount", Number of Terminals=2, Number of Terminations=2, Packaging="Cut Tape", Pins=2, Power Rating=330mW, Radiation Hardening=No, REACH SVHC=Yes, RoHS=Compliant, RoHS Compliant=Yes, Schedule B="8533210045, 8533210045", Termination=SMD/SMT, Voltage Rating (DC)=75V, Weight=2.012816mg, Width=850µm, Working Voltage=75V
R18A R18B R18C R18D R18E R18F: library part CMP-00394-2, "Res Thick Film 1210 100K Ohm 1% 0.5W(1/2W) ±100ppm/C Pad SMD Automotive T/R", Ambient Temperature Range High=70°C, Case/Package=1210, Manufacturer Lifecycle Status=ACTIVE, Max Operating Temperature=155°C, Min Operating Temperature=-55°C, Operating Supply Voltage=200V, Power=500mW, Temperature Coefficient=100ppm/°C, Tolerance=1%, China RoHS=Non-Compliant, Composition="Thick Film", Height=550µm, Lifecycle Status=Production, Mounting Technology="Surface Mount", Number of Terminals=2, Packaging="Cut Tape", Pins=2, Power Dissipation=500mW, Power Rating=500mW, REACH SVHC=Yes, RoHS=Compliant, Schedule B="8533210025, 8533210025", Voltage Rating=200V, Voltage Rating (DC)=200V, Width=2.6mm, Working Voltage=200V
R19A R19B R19C R19D R19E R19F R22A R22B R22C R22D R22E R22F R22G R22H R22I R22J: library part CMP-00392-1, "Res Thick Film 1210 130K Ohm 1% 0.5W ±100ppm/°C Molded SMD Embossed Carrier T/R", Case Code (Imperial)=1210, Case Code (Metric)=3225, Manufacturer Lifecycle Status=ACTIVE, Max Operating Temperature=155°C, Min Operating Temperature=-55°C, Power=500mW, Temperature Coefficient=100ppm/°C, Tolerance=1%, Voltage Rating=200V, Case/Package=1210, Composition="Thick Film", Contact Plating=Tin, Depth=2.5mm, Height=600µm, Length=3.2mm, Lifecycle Status=Production, Mounting Technology="Surface Mount", Number of Terminals=2, Packaging="Cut Tape", Part Series="Anti-Surge High Power Thick Film Chip Resistors", Pins=2, Power Dissipation=500mW, Power Rating=500mW, REACH SVHC=Yes, RoHS=Compliant, Termination=Flat, Voltage Rating (DC)=200V, Width=2.5mm, Working Voltage=200V
R20A R20B R20C R20D R20E R20F: library part CMP-00386-2, "Res Thick Film 1210 4.7K Ohm 1% 0.5W(1/2W) ±100ppm/C Pad SMD T/R Automotive AEC-Q200", Ambient Temperature Range High=70°C, Case/Package=1210, Manufacturer Lifecycle Status=ACTIVE, Max Operating Temperature=155°C, Min Operating Temperature=-55°C, Operating Supply Voltage=200V, Power=500mW, Temperature Coefficient=100ppm/°C, Tolerance=1%, China RoHS=Non-Compliant, Composition="Thick Film", Height=550µm, Lifecycle Status=Production, Mounting Technology="Surface Mount", Number of Terminals=2, Packaging="Cut Tape", Pins=2, Power Dissipation=500mW, Power Rating=500mW, REACH SVHC=Yes, RoHS=Compliant, Schedule B="8533210025, 8533210025", Voltage Rating=200V, Voltage Rating (DC)=200V, Width=2.6mm, Working Voltage=200V
R24A R24B R24C R24D R24E R24F: library part CMP-00050-3, "Fixed Resistor, Metal Glaze/thick Film, 0.1W, 33ohm, 75V, 1% +/-Tol, 100ppm/Cel, Surface Mount, 0603", Case/Package=0603, Max Operating Temperature=155°C, Min Operating Temperature=-55°C, Package Height=0.45mm, Package Length=1.6mm, Package Shape=Rectangular, Package Style=SMTMeter, Package Width=0.8mm, Power=100mW, Rated Temperature=70°C, Resistor Type="FIXED RESISTOR", Temperature Coefficient=100ppm/°C, Tolerance=1%, Working Voltage=75V, Construction=Rectangular, JESD-609 Code=e3, Mounting Technology="Surface Mount", Packaging="Tape and Reel", Pins=2, Reach SVHC Compliant=Yes, Reference Standard=AEC-Q200, RoHS Compliant=Yes, Technology="METAL GLAZE/THICK FILM", Terminal Finish=Nickel, Termination=Wraparound
R26A R26B: library part CMP-00405-2, "Fixed Resistor, Metal Glaze/thick Film, 1.5W, 300000ohm, 200V, 1% +/-Tol, 200ppm/Cel, Surface Mount, 1210", Case Code (Imperial)=1210, Case Code (Metric)=3225, Max Operating Temperature=155°C, Min Operating Temperature=-55°C, Power=1.5W, Power Dissipation=500mW, Temperature Coefficient=200ppm/°C, Tolerance=1%, Voltage Rating=200V, Case/Package=1210, China RoHS=Non-Compliant, Height=600µm, Lifecycle Status=Production, Mounting Technology="Surface Mount", Number of Terminals=2, Pins=2, Power Rating=500mW, REACH SVHC=Yes, RoHS=Compliant, Termination=SMD/SMT, Voltage Rating (DC)=200V, Width=2.6mm, Working Voltage=200V
U1: library part CMP-00024-00008-1, "CMOS BCD-to-Decimal or Binary-to-Octal Decoders/Drivers 16-TSSOP -55 to 125", Case/Package=TSSOP, High Level Output Current=6.8mA, Manufacturer Lifecycle Status=ACTIVE, Max Operating Temperature=125°C, Max Supply Voltage=18V, Min Operating Temperature=-55°C, Min Supply Voltage=3V, Quiescent Current=100µA, Bandwidth=8MHz, Contact Plating=Gold, Height=1.2mm, Independent Circuits=1, Lead Free="Lead Free", Length=5mm, Lifecycle Status=Production, Logic Function="Decoder, Demultiplexer", Low Level Output Current=6.8mA, Mounting Technology="Surface Mount", Number of Bits=10, Number of Channels=1, Number of Elements=1, Number of Input Lines=4, Number of Inputs=4, Number of Output Lines=10, Number of Outputs=10, Pins=16, Polarity=Non-Inverting, Propagation Delay=160ns, RoHS=Compliant, RoHS Compliant=Yes, Supply Type="Dual, Single", Thickness=1mm, Turn-On Delay Time=350ns, Weight=61.887009mg, Width=4.4mm
U2: library part CMP-00383-2, "RISC Microcontroller, 32-Bit, FLASH, CORTEX-M0 CPU, 64MHz, CMOS, PQFP32", Ambient Temperature Range High=85°C, Clock Frequency=48MHz, Frequency=64MHz, Max Junction Temperature (Tj)=105°C, Max Supply Current=6.9mA, Max Supply Voltage=3.6V, Min Operating Temperature=-40°C, Min Supply Voltage=1.7V, Operating Supply Voltage=1.8V, ADC Channels (Resolution)="16-Ch 12-Bit", China RoHS=Compliant, Core Architecture="ARM Cortex-M0+", Data Bus Width=32b, Data Memory=8K, EEPROM Memory Size=0B, Flash Memory Size=64kB, Height=1.6mm, Height - Seated (Max)=1.6mm, Interface="I2C, I2S, IrDA, LIN, SMBus, SPI, UART, USART", Length=7mm, Lifecycle Status=Production, Max Operating Temperature=85°C, Maximum Clock Frequency=64MHz, Memory Format=FLASH, Memory Size=64kB, Number of A/D Converters=1, Number of ADC Channels=16, Number of I2C Channels=2, Number of I/Os=3, Number of PWM Channels=17, Number of SPI Channels=2, Number of Terminals=32, Number of Timers/Counters=9, Number of UART Channels=3, Number of USART Channels=2, Peripherals=POR, Pins=32, Program Memory=64K, RAM Size=8kB, REACH SVHC=Yes, Register Bit Depth=32, RoHS=Compliant, Schedule B=8542310000, Supply Voltage Max=3.6V, Supply Voltage Min=1.7V, Terminal Pitch=800µm, Width=7mm
V1A V1B V1C V1D V1E V1F: library part CMP-00026-00006-13, "IN-14 Cold Cathode Valve", Case/Package=IN-14, Mounting Technology=THT, Pins=13
V2A V2B: library part CMP-00026-00007-7, "IN-3 Cold Cathode Indicator Valve", Mounting Technology=THT, Pins=2, RoHS Compliant=Yes
X1: library part CMP-003-00032-2, "Crystal 0.032768MHz ±20ppm (Tol) 12.5pF FUND 80000Ohm Automotive AEC-Q200 2-Pin SMD", Case/Package=SMD/SMT, ESR (Equivalent Series Resistance)=80kΩ, Frequency=32.768kHz, Frequency Stability=400ppm, Frequency Tolerance=0.002%, Load Capacitance=12.5pF, Max Operating Temperature=125°C, Min Operating Temperature=-40°C, ESR=80k, Height=900µm, Length=3.2004mm, Lifecycle Status=Production, Mounting Technology="Surface Mount", Packaging="Tape & Reel (TR)", Pins=2, REACH SVHC=Yes, RoHS=Compliant, RoHS Compliant=Yes, Schedule B=8541600080, Tolerance=0.002%, Width=1.4986mm

## Free pads (board coordinates)
  round 4 hole 2.5: 1(7,7) 2(48,7) 3(48,174) 4(7,174) 5(47,165) 6(47,141) 7(40,90.5) 8(15,90.5)
  round 8 hole 8 unplated: 7(47,153.3)

## Via types
v1: diameter 0.6, hole 0.3, Top Layer to Bottom Layer, tented both sides, 541 vias

## Nets (pads, with @x,y where several pads share a name; then routed paths per layer and width w, separated by ;. In a path a pad name is that pad's centre, name@x,y a point inside that pad or via, vN(x,y) a via of type N, cw(c..) or ccw(c..) an arc to the next point about the centre after c; other vN are vias at no path point)
!HV_SHDN: J1.33 J1.34 U2.17 | length 138.5
  Top Layer w0.3: v1(16.2,30.6) 16.2,30.611 15.9,30.911 15.9,69.9 13.9,71.9 13.9,85.9 14.8,86.8 16.6,86.8 18.1,88.3 18.1,92.2 16.3,94 14.6,94 13.3,95.3 13.3,108 19.7,114.4 19.7,116.5 19.4,116.8 19.4,118.3 19.9,118.8 v1(19.9,121.1)
  Bottom Layer w0.3: v1(16.2,30.6) 43.3,30.6 45.955,33.255 J1.34@47.659,33.255 J1.33@51.342,33.255 ; v1(19.9,121.1) 19.957,121.043 20.457,121.043 20.699,120.801 U2.17@20.7,119.7
+3V3: B1.+ C1.1 C4.1 C5.1 D3A.2 D3B.2 D3C.2 D3D.2 D3E.2 D3F.2 J1.25 J1.26 J1.27 J1.28 J1.29 J1.30 J1.31 J1.32 J4.3 R1.2 R2.2 R5.1 R6.2 U1.16 U2.4 | length 448.2
  Top Layer w0.2: 24.962,46.72 25.894,44.506 ; 25,172.3 25.782,170.247 ; 27.99,19.669 28.4,22.123
  Top Layer w0.3: D3D.2@27.498,103.971 27.528,104 30.7,104 v1(31.2,104.5) ; D3E.2@27.502,141.774 27.576,141.7 28.739,141.7 28.9,141.539 v1(28.9,140.8)
  Top Layer w0.5: v1(11.6,143) 11.6,135.439 12.738,134.301 v1(16.299,134.301) ; v1(11.7,118.6) 14.18,118.6 14.781,119.2 14.781,124.281 v1(15.4,124.9) ; v1(24.951,48.856) 24.962,48.846 24.962,46.72 ; 25,172.3 25,173.8 26.3,175.1 39,175.1 43.8,170.3 52,170.3 53,169.3 53,127.5 ; 25.782,170.247 cw(c25.525,170.149) 25.8,170.149 25.8,167.3 26.328,166.772 D3F.2@27.501,166.772 ; 25.894,44.506 26.5,43.9 28,43.9 29.2,42.7 29.2,41.6 28.774,41.174 D3B.2@27.493,41.174 ; D3A.2@27.5,16.175 28.775,16.175 29.2,16.6 29.2,17.5 27.99,18.71 27.99,19.669 ; D3C.2@27.758,78.972 30.472,78.972 v1(31.1,79.6) ; 28.4,22.123 v1(28.4,28.2) ; v1(45.9,29.5) 45.9,33.3 47.5,34.9 47.5,38.6 53,44.1 v1(53,53) v1(53,83.2) v1(53,106.9) 53,127.5 ; v1(45.9,127.5) 53,127.5
  Bottom Layer w0.2: 31.7,80.2 33.6,81.2 ; 31.912,105.3 33.772,106.2
  Bottom Layer w0.3: 22.3,145.5 22.3,145.483 24.1,143.683 24.1,141.7 25,140.8 v1(28.9,140.8) ; v1(31.2,104.5) 31.2,104.581 31.35,104.731 31.35,104.738 31.912,105.3 ; v1(45.9,127.5) R5.1@45.9,128.7
  Bottom Layer w0.5: B1.+@6.8,157.3 11.3,157.3 12.2,156.4 12.2,151 ; R6.2@8.1,146.182 8.1,144.1 9.2,143 v1(11.6,143) 12.2,143.6 12.2,151 ; J4.3@9.1,116.17 11.37,116.17 11.7,116.5 v1(11.7,118.6) C1.1@11.7,119.675 11.55,119.825 11.175,119.825 10.675,120.325 U1.16@9.85,120.325 ; v1(15.4,124.9) 15.419,124.919 15.519,124.919 17.5,126.9 U2.4@17.5,128.1 C4.1@17.5,131.2 C5.1@17.5,132.5 ; v1(16.299,134.301) 16.899,134.301 17.5,133.7 C5.1@17.5,132.75 ; C5.1@17.5,132.7 34.7,132.7 38.7,128.7 R1.2@43.1,128.7 43.1,129.8 43.4,130.1 45.6,130.1 45.9,129.8 R5.1@45.9,128.7 ; 22.3,145.5 22,145.8 22,148.4 19.4,151 12.2,151 ; v1(24.951,48.856) 24.951,50.751 25.7,51.5 40.1,51.5 41.6,53 v1(53,53) ; v1(28.4,28.2) 44.6,28.2 v1(45.9,29.5) 45.919,29.481 47.623,29.481 J1.28@47.659,29.445 ; v1(31.1,79.6) 31.7,80.2 ; 33.6,81.2 47.7,81.2 49.7,83.2 v1(53,83.2) ; 33.772,106.2 34.145,106.2 cw(c34.145,105.825) 34.41,106.09 34.6,105.9 40.5,105.9 41.5,106.9 44.5,106.9 ; R2.2@44.5,109.8 44.5,106.9 ; v1(53,106.9) 44.5,106.9
+100V: J1.13 J1.14 J1.15 J1.16 J1.17 J1.18 J1.19 J1.20 R22A.2 R22B.2 R22C.2 R22D.2 R22E.2 R22F.2 R22G.2 R22H.2 R22I.2 R22J.2 | length 219.3
  Top Layer w0.3: v1(4.5,63.5) v1(4.5,76.9) v1(4.5,84.2) v1(4.5,91.6) 4.5,93.141 5.2,93.841 v1(5.2,98.7) ; v1(44.9,24.3) 44.9,33.6 46.5,35.2 46.5,39.2 51.3,44 v1(51.3,63.5) ; v1(50.9,80.9) v1(50.9,89.6)
  Bottom Layer w0.3: R22A.2@4.497,71.039 4.497,69.703 v1(4.5,69.7) ; R22B.2@4.497,78.3 4.5,78.297 v1(4.5,76.9) ; R22C.2@4.497,85.608 4.5,85.605 v1(4.5,84.2) ; R22D.2@4.497,92.938 4.5,92.934 v1(4.5,91.6) ; R22E.2@4.497,100.095 4.775,100.095 5.2,99.67 v1(5.2,98.7) ; v1(4.5,63.5) 4.55,63.45 30.45,63.45 32.115,65.115 ; R22F.2@36.597,66.831 33.831,66.831 32.115,65.115 ; v1(44.9,24.3) 44.933,24.333 47.1,24.333 47.132,24.365 J1.20@47.659,24.365 ; R22G.2@46.697,69.762 46.643,69.708 45.108,69.708 44.4,69 44.4,65 45.2,64.2 48.4,64.2 49.1,63.5 ; R22H.2@46.697,77.016 46.697,78.297 49.3,80.9 v1(50.9,80.9) 52.5,80.9 53,80.4 53,64.2 52.3,63.5 v1(51.3,63.5) 49.1,63.5 ; R22I.2@46.697,95.605 43.666,95.605 43.505,95.766 ; R22J.2@46.797,102.941 44.241,102.941 43.505,102.205 43.505,95.766 ; v1(50.9,89.6) 44.4,89.6 43.505,90.495 43.505,95.766 ; 32.115,65.115 37.231,60 48.3,60 49.1,60.8 49.1,63.5
+HV: J1.1 J1.2 J1.3 J1.4 J1.5 J1.6 J1.7 J1.8 Q3A.3 Q3B.3 Q3C.3 Q3D.3 Q3E.3 Q3F.3 R18A.2 R18B.2 R18C.2 R18D.2 R18E.2 R18F.2 R26A.2 R26B.2 | length 267.3
  Top Layer w0.3: v1(17.7,157.4) 17.7,167.8 18.426,168.526 v1(19.15,168.526) ; v1(18.75,155.35) 18.7,155.3 v1(18.7,148) 18.7,147.919 18.3,147.519 18.3,136.8 19.2,135.9 19.2,133.4 18.8,133 v1(18.8,131.55) ; v1(19.2,4.9) 19.119,4.9 18.4,5.619 18.4,17.1 v1(19.1,17.8) 19.1,17.881 18.65,18.331 18.65,42.317 v1(19.224,42.891) 19.224,43.676 18.85,44.05 v1(18.85,54.5) 18.85,72.523 17.7,73.673 17.7,79.25 v1(19.15,80.7) 19.15,82.65 22.6,86.1 22.6,94.3 18.4,98.5 18.4,104.5 v1(19.15,105.25) 19.15,107.85 23.1,111.8 24.3,111.8 27.38,114.88 27.38,115.093 v1(27.438,115.15) ; v1(23.708,130.592) 23.75,130.55 26.35,130.55 28.5,128.4 30.8,128.4 34.698,124.502 v1(34.698,118.103)
  Bottom Layer w0.3: v1(17.7,157.4) 17.7,156.3 18.5,155.5 18.519,155.5 18.669,155.35 v1(18.75,155.35) ; Q3C.3@17.888,80.597 17.888,80.647 18.138,80.897 18.188,80.897 18.611,81.32 ; Q3A.3@17.9,17.8 17.9,17.85 18.15,18.1 18.2,18.1 18.687,18.587 ; Q3B.3@17.9,42.803 17.9,42.853 18.687,43.64 R18B.2@18.687,45.207 ; Q3E.3@17.901,143.409 17.901,143.459 18.151,143.709 18.201,143.709 18.689,144.196 R18E.2@18.689,145.812 18.7,145.824 v1(18.7,148) ; Q3D.3@17.904,105.601 17.904,105.651 18.154,105.901 18.204,105.901 18.692,106.388 ; Q3F.3@17.906,168.402 17.906,168.452 18.156,168.702 18.206,168.702 18.693,169.189 R18F.2@18.693,170.805 ; R18C.2@18.658,83.041 R18C.2@18.675,83.024 ; R18C.2@18.675,83 18.675,81.384 18.611,81.32 ; R18A.2@18.687,20.203 18.687,18.587 ; R18D.2@18.692,108.004 18.692,106.388 ; R18D.2@18.692,108.028 18.692,106.388 ; 18.756,169.001 19.15,168.607 v1(19.15,168.526) ; 18.758,43.449 18.935,43.272 18.935,43.261 19.224,42.972 v1(19.224,42.891) ; v1(18.8,131.55) 19.758,130.592 v1(23.708,130.592) ; v1(18.85,54.5) R26A.2@26.125,54.5 ; v1(19.1,17.8) 19.043,17.857 19.043,18.232 18.687,18.587 ; v1(19.15,80.7) 19.15,80.781 18.738,81.193 18.611,81.32 ; v1(19.15,105.25) 19.13,105.27 19.13,105.95 18.692,106.388 ; v1(19.2,4.9) 37.213,4.9 37.8,5.487 37.8,10.287 38.513,11 44.4,11 45,11.6 45,16.073 45.672,16.745 J1.8@47.659,16.745 ; R26B.2@26.125,117.3 27,117.3 27.4,116.9 27.4,115.188 v1(27.438,115.15) 29.85,115.15 32.8,118.1 34.695,118.1 v1(34.698,118.103)
ANODE_DRIVER_0: R20A.1 V1A.ANODE | length 6.2
  Bottom Layer w0.3: R20A.1@18.012,11.328 19.662,11.328 20.253,11.919 20.253,14.203 V1A.ANODE@21.25,15.2
ANODE_DRIVER_1: R20B.1 V1B.ANODE | length 6.2
  Bottom Layer w0.3: R20B.1@18.012,36.332 19.662,36.332 20.253,36.922 20.253,39.206 V1B.ANODE@21.25,40.203
ANODE_DRIVER_2: R20C.1 V1C.ANODE | length 6.2
  Bottom Layer w0.3: R20C.1@18,74.125 19.65,74.125 20.24,74.715 20.24,76.999 V1C.ANODE@21.238,77.997
ANODE_DRIVER_3: R20D.1 V1D.ANODE | length 6.2
  Bottom Layer w0.3: R20D.1@18.017,99.129 19.667,99.129 20.257,99.72 20.257,102.004 V1D.ANODE@21.254,103.001
ANODE_DRIVER_4: R20E.1 V1E.ANODE | length 6.2
  Bottom Layer w0.3: R20E.1@18.014,136.937 19.664,136.937 20.254,137.528 20.254,139.811 V1E.ANODE@21.251,140.809
ANODE_DRIVER_5: R20F.1 V1F.ANODE | length 6.2
  Bottom Layer w0.3: R20F.1@18.018,161.93 19.668,161.93 20.258,162.521 20.258,164.805 V1F.ANODE@21.256,165.802
AS_0: R21A.1 U2.11 | length 140.9